# Altium PCB MICRO-USB-SMD_U254-051T-4BH23-S2S.pcbdoc
Units mm, origin at the board's own origin, x right, y up, seen from the top; angles counter-clockwise.
Board outline 21.55 x 19.05 mm, 2 copper layers (Top Layer, Bottom Layer); 1 components, 0 nets, 9 pads, 0 vias.
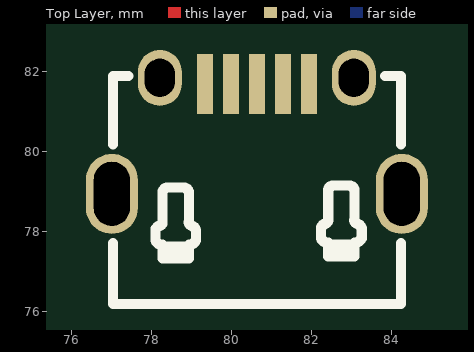
[diagram p0: Top Layer view]
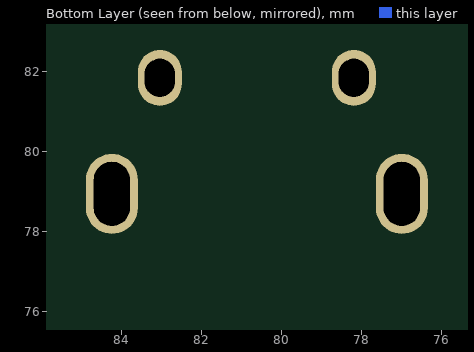
[diagram p1: Bottom Layer view, seen from below]

## Layer stack, top to bottom
Top Layer: signal copper (thickness not stored)
Dielectric: dielectric 0.32, FR-4, Dk 4.8
Bottom Layer: signal copper (thickness not stored)

## Board outline
91.399,69.85 69.85,69.85 69.85,88.9 91.399,88.9

## Components (designator, comment, footprint, x,y, rotation, side; value= is the part's Value field where it differs from the comment)
? "MICRO-USB-SMD_U254-051T-4BH23-S2S" MICRO-USB-SMD_U254-051T-4BH23-S2S 80.625,80.4 r0 top

## Footprints (in the part's own frame and the unit in brackets; to place one, negate y for a bottom-side part, rotate by r counter-clockwise, add the part's x,y. Pads: shape width x height; smd on the part's side, far side on the other; paste and mask are expansions set on the pad)
MICRO-USB-SMD_U254-051T-4BH23-S2S [mm]
  rect 0.4x1.5 smd: 1(-1.3,1.3) 2(-0.65,1.3) 3(0,1.3) 4(0.65,1.3) 5(1.3,1.3)
  oval 1.3x2 hole 0.9 slot 1.6 at 90 deg: 6(-3.625,-1.45) 6(3.625,-1.45)
  oval 1.1x1.4 hole 0.75 slot 0.95 at 90 deg: 6(-2.425,1.45) 6(2.425,1.45)
  silkscreen extent -3.6,-4.2 3.61,1.5

## Nets (pads, with @x,y where several pads share a name; then routed paths per layer and width w, separated by ;. In a path a pad name is that pad's centre, name@x,y a point inside that pad or via, vN(x,y) a via of type N, cw(c..) or ccw(c..) an arc to the next point about the centre after c; other vN are vias at no path point)
pads on no net: ?.1 ?.2 ?.3 ?.4 ?.5 ?.6